# EAGLE board LC4032V-CPLDbreakout-v1 (EAGLE 5.11)
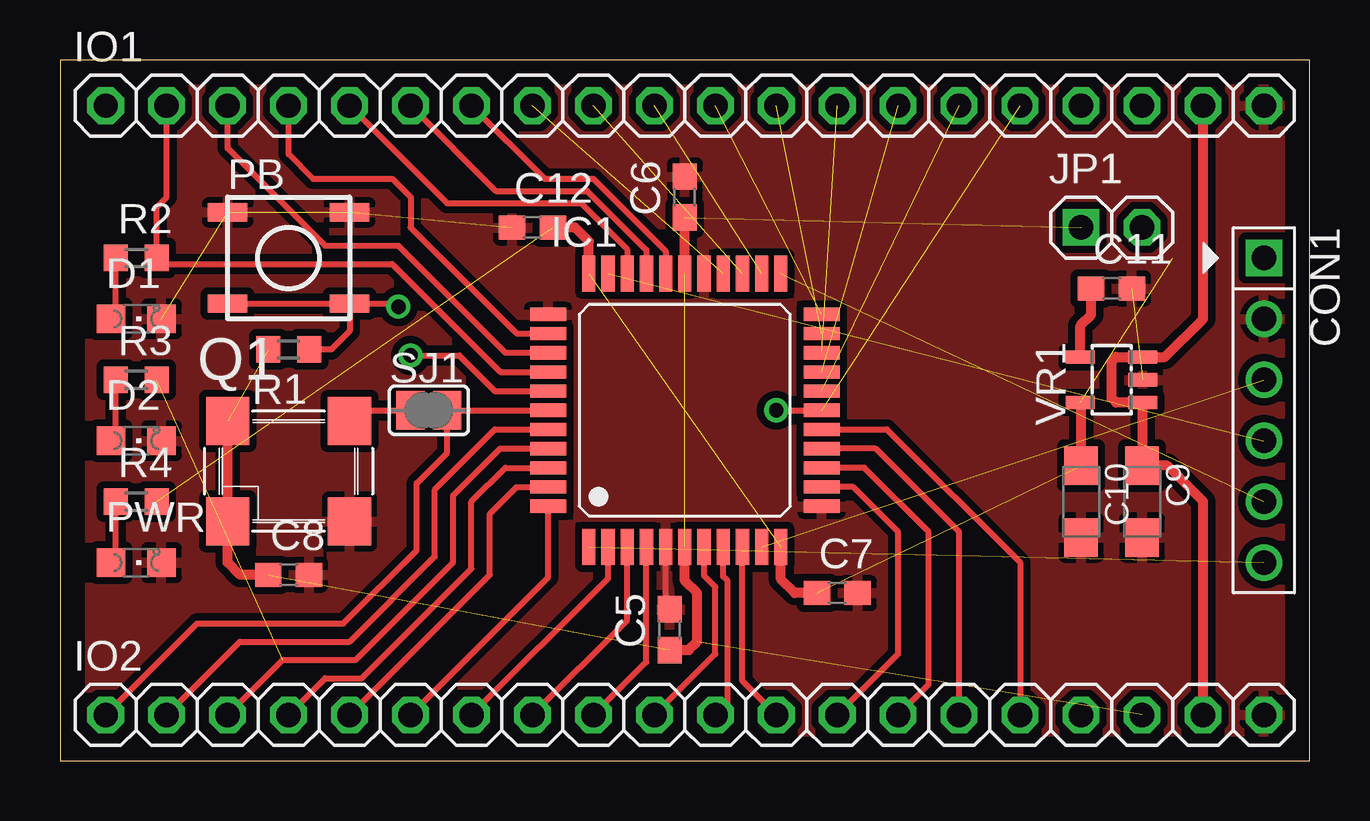
[diagram p0: board, top side]
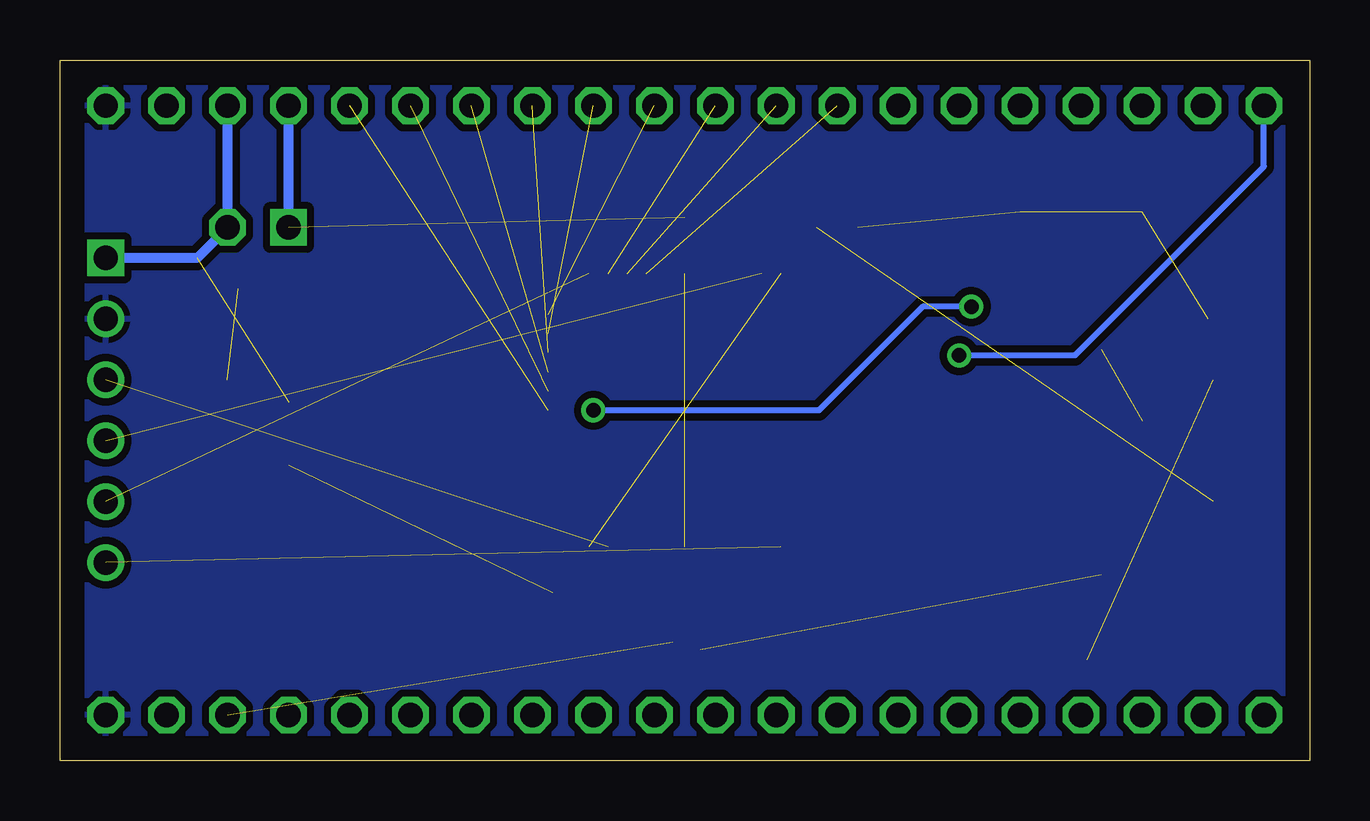
[diagram p1: board, bottom side, seen from below]

Size 52.07 x 29.21 mm. Coordinates in mm from the lower left corner, seen from the top.
Outline: 0,0 52.07,0 52.07,29.21 0,29.21 0,0
Copper layers (1*16): Top 0.035mm / dielectric 1.5mm / Bottom 0.035mm
Design rules "default": minimum track width 10mil, minimum drill 0.6mm, track to track 8mil, track to pad 8mil, pad to pad 8mil, via to via 8mil, smd to smd 8mil, copper to edge 40mil, drill to drill 8mil, minimum pad ring 10mil, minimum via ring 8mil, stop-mask expansion 4mil, vias tented up to drill 0mil, thermal gap 10mil

## Footprints (pad centres in the part's own frame; a part is rotated, then mirrored left to right if it is on the bottom)
C603 = smd 1.1 x 1: 1 -0.85,0; 2 0.85,0
SMC_A = smd 1.6 x 1.4: + -1.5,0; - 1.5,0
HEADER_PRG_1X06 = drill 1.016 square: 1 -6.35,0 | drill 1.016 round: 2 -3.81,0; 3 -1.27,0; 4 1.27,0; 5 3.81,0; 6 6.35,0
LED-805 = smd 1.2 x 1.2: A 0,-1.05; C 0,1.05
TQFP44 = smd 0.55 x 1.5: P1 -4,-5.7; P2 -3.2,-5.7; P3 -2.4,-5.7; P4 -1.6,-5.7; P5 -0.8,-5.7; P6 0,-5.7; P7 0.8,-5.7; P8 1.6,-5.7; P9 2.4,-5.7; P10 3.2,-5.7; P11 4,-5.7; P23 4,5.7; P24 3.2,5.7; P25 2.4,5.7; P26 1.6,5.7; P27 0.8,5.7; P28 0,5.7; P29 -0.8,5.7; P30 -1.6,5.7; P31 -2.4,5.7; P32 -3.2,5.7; P33 -4,5.7 | smd 1.5 x 0.55: P12 5.7,-4; P13 5.7,-3.2; P14 5.7,-2.4; P15 5.7,-1.6; P16 5.7,-0.8; P17 5.7,0; P18 5.7,0.8; P19 5.7,1.6; P20 5.7,2.4; P21 5.7,3.2; P22 5.7,4; P34 -5.7,4; P35 -5.7,3.2; P36 -5.7,2.4; P37 -5.7,1.6; P38 -5.7,0.8; P39 -5.7,0; P40 -5.7,-0.8; P41 -5.7,-1.6; P42 -5.7,-2.4; P43 -5.7,-3.2; P44 -5.7,-4
1X20 = drill 1.016 octagon: 1 -24.13,0; 2 -21.59,0; 3 -19.05,0; 4 -16.51,0; 5 -13.97,0; 6 -11.43,0; 7 -8.89,0; 8 -6.35,0; 9 -3.81,0; 10 -1.27,0; 11 1.27,0; 12 3.81,0; 13 6.35,0; 14 8.89,0; 15 11.43,0; 16 13.97,0; 17 16.51,0; 18 19.05,0; 19 21.59,0; 20 24.13,0
1X02-S = drill 1.016 square: 1 -1.27,0 | drill 1.016 octagon: 2 1.27,0
TACT_SWITCH_SMALL = smd 1.651 x 0.762: 1 -2.54,1.905; 2 2.54,1.905; 3 -2.54,-1.905; 4 2.54,-1.905
OSCILLATOR_7X5_SMD = smd 1.8 x 2: 1 -2.54,-2.1; 2 2.54,-2.1; 3 2.54,2.1; 4 -2.54,2.1
R603 = smd 1 x 1.1: 1 -0.85,0; 2 0.85,0
SJ = smd 1.168 x 1.6: 1 -0.762,0; 2 0.762,0
SOT-23-5 = smd 0.55 x 1.2: 1 -0.95,-1.3; 2 0,-1.3; 3 0.95,-1.3; 4 0.95,1.3; 5 -0.95,1.3

## Placement (x,y rotation side)
C5  0.1uF  [C603]  25.4,5.46 90 top
C6  0.1uF  [C603]  26.04,23.49 90 top
C7  0.1uF  [C603]  32.39,6.99 0 top
C8  0.1uF  [C603]  9.53,7.75 0 top
C9  3.3uF  [SMC_A]  45.09,10.79 270 top
C10  3.3uF  [SMC_A]  42.55,10.79 270 top
C11  470pF  [C603]  43.82,19.68 0 top
C12  0.1uF  [C603]  19.68,22.22 0 top
CON1  HEADER_PRG_XILINX_JTAG6  [HEADER_PRG_1X06]  50.16,14.61 270 top
D1  Yellow LED  [LED-805]  3.17,18.41 270 top
D2  Yellow LED  [LED-805]  3.17,13.34 270 top
IC1  LC4032V-TQFP44  [TQFP44]  26.04,14.61 0 top
IO1  [1X20]  26.04,27.3 0 top
IO2  [1X20]  26.04,1.91 0 top
JP1  [1X02-S]  43.82,22.22 0 top
PB  SMD button small  [TACT_SWITCH_SMALL]  9.53,20.95 0 top
PWR  Yellow LED  [LED-805]  3.17,8.26 270 top
Q1  OSC-OSCILLATOR  [OSCILLATOR_7X5_SMD]  9.53,12.06 0 top
R1  10K  [R603]  9.53,17.14 180 top
R2  2K  [R603]  3.17,20.95 0 top
R3  2K  [R603]  3.17,15.88 0 top
R4  2K  [R603]  3.17,10.79 0 top
SJ1  [SJ]  15.37,14.61 0 top
VR1  3.3 VREG  [SOT-23-5]  43.82,15.88 90 top

## Library data of the parts
C5-C12 CON1 D1 D2 IC1 PB PWR Q1 R1-R4 VR1 = dp_devices
IO1 IO2 = pinhead
JP1 = pinhead-2
SJ1 = jumper

## Nets
+3V3: C7.1 C10.+ C12.2 CON1.1 IC1.P11 IC1.P33 IO1.18 JP1.2 R4.2 VR1.5
BANK1_0: IC1.P39 IO2.1 SJ1.2
BANK1_1: IC1.P40 IO2.2
BANK1_2: IC1.P41 IO2.3 R3.2
BANK1_3: IC1.P42 IO2.4
BANK1_4: IC1.P43 IO2.5
BANK1_5: IC1.P44 IO2.6
BANK1_6: IC1.P2 IO2.7
BANK1_7: IC1.P3 IO2.8
BANK1_8: IC1.P4 IO2.9
BANK1_9: IC1.P7 IO2.10
BANK1_10: IC1.P8 IO2.11
BANK1_11: IC1.P9 IO2.12
BANK1_12: IC1.P13 IO2.13
BANK1_13: IC1.P14 IO2.14
BANK1_14: IC1.P15 IO2.15
BANK1_15: IC1.P16 IO2.16
BANK2_0: IC1.P38 IO1.1
BANK2_1: IC1.P37 IO1.2 R2.2
BANK2_2: IC1.P36 IO1.3
BANK2_3: IC1.P35 IO1.4
BANK2_4: IC1.P31 IO1.5
BANK2_5: IC1.P30 IO1.6
BANK2_6: IC1.P29 IO1.7
BANK2_7: IC1.P26 IO1.8
BANK2_8: IC1.P25 IO1.9
BANK2_9: IC1.P24 IO1.10
BANK2_10: IC1.P22 IO1.11
BANK2_11: IC1.P21 IO1.12
BANK2_12: IC1.P20 IO1.13
BANK2_13: IC1.P19 IO1.14
BANK2_14: IC1.P18 IO1.15
BANK2_15: IC1.P17 IO1.16 PB.3 PB.4 R1.1
GND: C5.2 C6.2 C7.2 C8.2 C9.- C10.- C11.2 C12.1 CON1.2 D1.C D2.C IC1.P5 IC1.P12 IC1.P27 IC1.P34 IO1.20 IO2.20 PB.1 PB.2 PWR.C Q1.2 VR1.2
JTAG_TCK: CON1.3 IC1.P10
JTAG_TDI: CON1.6 IC1.P1
JTAG_TDO: CON1.4 IC1.P32
JTAG_TMS: CON1.5 IC1.P23
N$1: D1.A R2.1
N$2: D2.A R3.1
N$3: PWR.A R4.1
N$5: Q1.3 SJ1.1
N$7: C11.1 VR1.4
NC@1: IO2.17
VCC: C9.+ IO1.19 IO2.19 VR1.1 VR1.3
VCC_IO: C5.1 C6.1 C8.1 IC1.P6 IC1.P28 IO1.17 IO2.18 JP1.1 Q1.1 Q1.4 R1.2

## Tracks (layer width: path | path; a pad name or v marks a point on that pad's centre or on a via)
+3V3  (4 unrouted)
  Top 0.406: IC1.P33 22.04,21.65 21.46,22.22 C12.2 | IC1.P11 30.04,7.56 30.61,6.99 C7.1 | C10.+ 42.55,14.89 VR1.5
  Bottom 0.406: IO1.18 JP1.2 46.36,20.95 CON1.1
BANK1_0
  Top 0.254: IC1.P39 SJ1.2 16.13,12.83 14.86,11.56 14.86,8.76 11.81,5.71 5.71,5.71 IO2.1
BANK1_1
  Top 0.254: IC1.P40 18.12,13.8 15.62,11.3 15.62,8.51 12.06,4.95 7.49,4.95 IO2.2
BANK1_2  (1 unrouted)
  Top 0.254: IC1.P41 18.34,13.01 16.38,11.05 16.38,8.26 12.32,4.19 9.27,4.19 IO2.3
BANK1_3
  Top 0.254: IC1.P42 18.55,12.21 17.14,10.79 17.14,8 12.57,3.43 11.05,3.43 IO2.4
BANK1_4
  Top 0.254: IC1.P43 19.02,11.4 17.91,10.29 17.91,7.75 IO2.5
BANK1_5
  Top 0.254: IC1.P44 20.33,7.63 IO2.6
BANK1_6
  Top 0.254: IC1.P2 22.83,7.6 IO2.7
BANK1_7
  Top 0.254: IC1.P3 23.63,5.86 IO2.8
BANK1_8
  Top 0.254: IC1.P4 24.43,4.12 IO2.9
BANK1_9
  Top 0.254: IC1.P7 26.83,7.71 27.3,7.24 27.3,4.45 IO2.10
BANK1_10
  Top 0.254: 27.63,2.24 IO2.11 27.81,2.41 27.81,7.49 27.63,7.67 IC1.P8
BANK1_11
  Top 0.254: IC1.P9 28.43,3.32 IO2.12
BANK1_12
  Top 0.254: IC1.P13 33.05,11.4 34.93,9.53 34.93,4.45 IO2.13
BANK1_13
  Top 0.254: IC1.P14 33.52,12.21 36.2,9.53 36.2,3.17 IO2.14
BANK1_14
  Top 0.254: IC1.P15 33.98,13.01 37.47,9.53 IO2.15
BANK1_15
  Top 0.254: IC1.P16 34.46,13.8 40.01,8.26 IO2.16
BANK2_0  (via drill 0.6)
  Top 0.254: IC1.P38 18.12,15.4 16.64,16.89 v14.61,16.89
  Bottom 0.254: v14.61,16.89 9.78,16.89 1.91,24.76 IO1.1
BANK2_1
  Top 0.254: IO1.2 4.45,23.49 4.03,23.07 R2.2 4.28,20.7 13.84,20.7 18.34,16.2 IC1.P37
BANK2_2
  Top 0.254: IC1.P36 18.55,17 14.1,21.46 11.05,21.46 6.99,25.53 IO1.3
BANK2_3
  Top 0.254: IC1.P35 19.02,17.8 14.61,22.22 14.61,23.49 13.84,24.26 10.54,24.26 9.53,25.27 IO1.4
BANK2_4
  Top 0.254: IC1.P31 23.63,21.32 21.72,23.24 16.13,23.24 IO1.5
BANK2_5
  Top 0.254: IC1.P30 24.43,21.29 21.97,23.75 18.16,23.75 IO1.6
BANK2_6
  Top 0.254: IC1.P29 25.23,21.25 22.22,24.26 20.19,24.26 IO1.7
BANK2_7  (1 unrouted)
BANK2_8  (1 unrouted)
BANK2_9  (1 unrouted)
BANK2_10  (1 unrouted)
BANK2_11  (1 unrouted)
BANK2_12  (1 unrouted)
BANK2_13  (1 unrouted)
BANK2_14  (1 unrouted)
BANK2_15  (via drill 0.6)  (1 unrouted)
  Top 0.254: PB.3 PB.4 | R1.1 11.3,17.14 12.06,17.91 PB.4 | v29.84,14.61 IC1.P17 | PB.4 13.97,19.05 v14.1,18.92
  Bottom 0.254: v29.84,14.61 20.45,14.61 16.13,18.92 v14.1,18.92
GND  (4 unrouted)
  Top 0.254: IC1.P5 25.23,6.48 C5.2
  pour Bottom (isolate 0.305): -0.64,-0.64 52.71,-0.64 52.71,29.84 -0.64,29.84
  pour Top (isolate 0.305): -0.64,-0.64 52.71,-0.64 52.71,29.84 -0.64,29.84
JTAG_TCK  (1 unrouted)
JTAG_TDI  (1 unrouted)
JTAG_TDO  (1 unrouted)
JTAG_TMS  (1 unrouted)
N$1
  Top 0.254: R2.1 2.33,18.61 D1.A
N$2
  Top 0.254: R3.1 2.33,13.54 D2.A
N$3
  Top 0.254: R4.1 2.33,8.46 PWR.A
N$5
  Top 0.254: SJ1.1 12.51,14.61 Q1.3
N$7
  Top 0.406: VR1.4 42.52,18.13 42.97,18.58 C11.1
VCC
  Top 0.406: IO1.19 47.62,18.41 46.04,16.82 VR1.3 44,16.82 43.82,16.64 43.82,15.11 44,14.93 VR1.1 45.12,12.33 C9.+ 46.12,12.29 47.62,10.79 IO2.19
VCC_IO  (5 unrouted)
  Top 0.406: IC1.P6 26.04,7.49 26.54,6.99 26.54,4.95 26.2,4.61 C5.1 | Q1.4 Q1.1 6.99,8.26 7.49,7.75 C8.1 | IC1.P28 C6.1
  Bottom 0.406: JP1.1 IO1.17